# Altium PCB quadkey.PcbDoc
Units mm, origin at the board's own origin, x right, y up, seen from the top; angles counter-clockwise.
Board outline 152.4 x 101.6 mm, 2 copper layers (Top Layer, Bottom Layer); 35 components, 23 nets, 138 pads, 0 vias.
Unrouted connection lines stored in the file: 69.
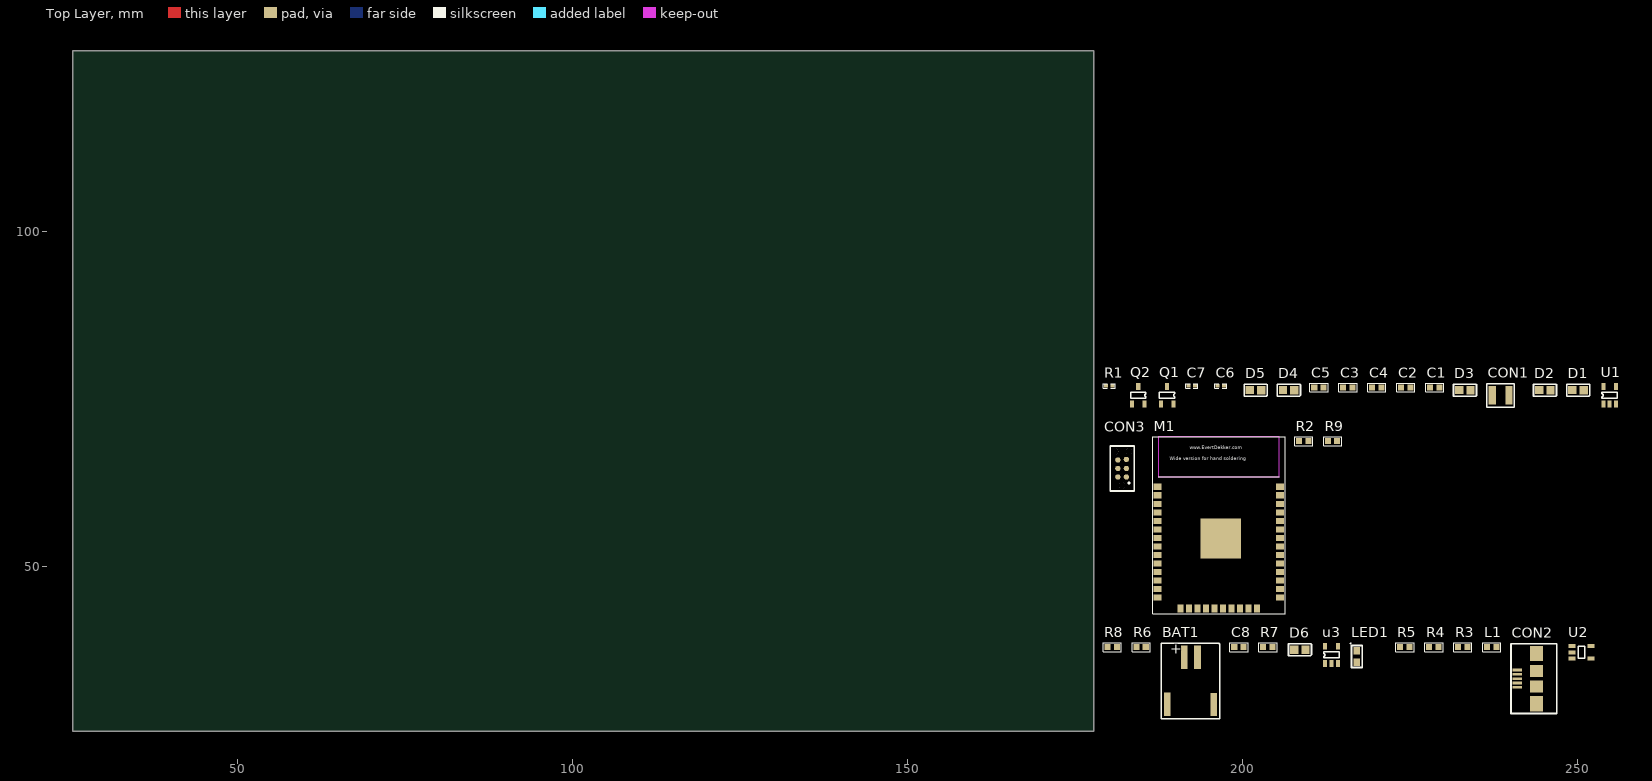
[diagram p0: Top Layer view]
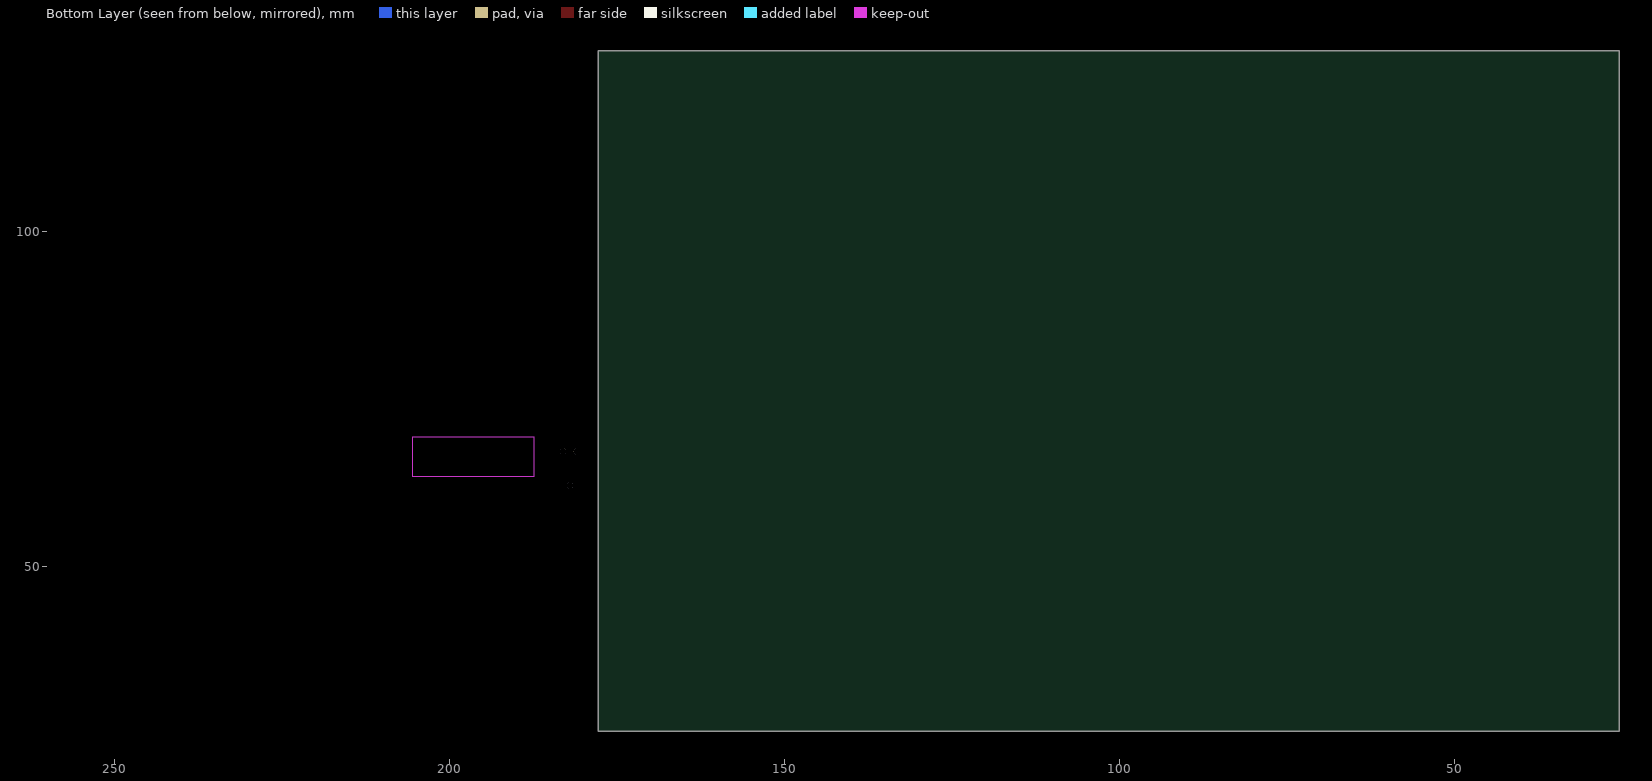
[diagram p1: Bottom Layer view, seen from below]

## Layer stack, top to bottom
Top Solder: solder mask 0.0102, Solder Resist, Dk 3.5
Top Layer: signal copper 0.0356
Dielectric 1: dielectric 0.32, FR-4, Dk 4.8
Bottom Layer: signal copper 0.0356
Bottom Solder: solder mask 0.0102, Solder Resist, Dk 3.5

## Board outline
25.4,25.4 177.8,25.4 177.8,127 25.4,127

## Design rules (kind name [scope] priority, off if disabled: settings)
Clearance [All] p1: gap=0.254 ignorepadtopadclearanceinfootprint=FALSE except(0: Arc-Hole Track-Hole SMDPad-Hole THPad-Hole Via-Hole Fill-Hole Poly-Hole Region-Hole Text-Hole)
PolygonConnect [All] p1: connectstyle=Relief reliefconductorwidth=0.254 reliefentries=4 polygonreliefangle="90 Angle" airgapwidth=0.254
RoutingVias [All] p1: holewidth=0.711 width=1.27 viastyle="Through Hole" minholewidth=0.711 minwidth=1.27 maxholewidth=0.711 maxwidth=1.27
SolderMaskExpansion [All] p1: expansion=0.102 istentingtop=FALSE
Width [All] p1: maxlimit=0.254 minlimit=0.254 preferedwidth=0.254
30 further rules are at their usual default settings.

## Classes and differential pairs
component class voeding: C1 C2 C3 C4 C5 C6 C7 CON1 D1 D2 D3 D4 D5 Q1 Q2 R1 U1
component class Designator: CON3 M1 R2 R9
component class charger: BAT1 C8 CON2 D6 L1 LED1 R3 R4 R5 R6 R7 R8 U2 u3

## Components (designator, comment, footprint, x,y, rotation, side; value= is the part's Value field where it differs from the comment)
BAT1 "batery" "jst 2pin" 191.262,36.449 r0 top
C1 "0,022uF" 0603 227.965,76.708 r0 top
C2 "470pF" 0603 223.647,76.708 r0 top
C3 "10uF" 0603 215.011,76.708 r0 top
C4 "10uF" 0603 219.329,76.708 r0 top
C5 "0,022uF" 0603 210.693,76.708 r0 top
C6 "47nF" CAPC1005X04L 196.723,76.962 r0 top
C7 "47nF" CAPC1005X04L 192.405,76.962 r0 top
C8 "10uF" 0603 198.755,37.973 r0 top
CON1 "screw connector" muratta 238.506,75.565 r0 top
CON2 "USB" microusb 242.443,33.274 r90 top
CON3 "Tagconnect" Tagconnect 181.991,64.643 r90 top
D1 "MBR0540-TP" Diode 250.063,76.327 r0 top
D2 "MBR0540-TP" Diode 245.11,76.327 r0 top
D3 "MBR0540-TP" Diode 233.172,76.327 r0 top
D4 "MBR0540-TP" Diode 206.883,76.327 r0 top
D5 "MBR0540-TP" Diode 201.93,76.327 r0 top
D6 "FC4SDCBMF6.0-T1" Diode 208.534,37.592 r0 top
L1 "ferite bead" 0603 236.474,37.973 r0 top
LED1 "LED" LED 217.043,36.576 r90 top
M1 "ESP32S_Module" ESP32S_W 196.469,52.832 r0 top
Q1 "2N7002ET1G" "N-channel FET" 188.849,75.565 r0 top
Q2 "2N7002ET1G" "N-channel FET" 184.531,75.565 r0 top
R1 "10K" CAPC1005X04L 180.086,76.962 r0 top
R2 "1k" 0603 208.407,68.707 r0 top
R3 "1k" 0603 232.156,37.973 r0 top
R4 "1k" 0603 227.838,37.973 r0 top
R5 "1k" 0603 223.52,37.973 r0 top
R6 "1k" 0603 184.15,37.973 r0 top
R7 "resistor" 0603 203.073,37.973 r0 top
R8 "resistor" 0603 179.832,37.973 r0 top
R9 "1k" 0603 212.725,68.707 r0 top
U1 "MCP1755T-500E/OT" "AP2112 sot25" 254.508,75.565 r0 top
U2 "MCP73831" MCP73831/2 250.571,37.211 r0 top
u3 "ap2112 SOT25" "AP2112 sot25" 212.979,36.83 r0 top

## Footprints (in the part's own frame and the unit in brackets; to place one, negate y for a bottom-side part, rotate by r counter-clockwise, add the part's x,y. Pads: shape width x height; smd on the part's side, far side on the other; paste and mask are expansions set on the pad)
0603 [mm]
  rect 0.9x0.9 smd: 1(0,0) 2(1.4,0)
  silkscreen extent -0.64,-0.65 2.07,0.64, body extent -0.03,-0.38 1.57,0.42, height 0.3
"AP2112 sot25" [mm]
  round 0.2 on Top Overlay: 1(-1.225,-0.55)
  rect 0.6x1 smd: 1(-0.675,-1.3) 2(0.275,-1.3) 3(1.225,-1.3) 4(1.225,1.3) 5(-0.675,1.3)
  silkscreen extent -0.87,-0.45 1.43,0.45, body extent -1.19,-1.17 1.74,1.17, height 1
CAPC1005X04L [mm]
  rect 0.6x0.5 smd: 1(-0.5,0) 2(0.5,0)
  silkscreen extent -0.9,-0.35 0.9,0.35, body extent -0.51,-0.25 0.51,0.25, height 0.5
Diode [mm]
  rect 1.25x1.22 smd: 1(-0.85,0)
  rect 1.25x1.25 smd: 2(0.85,0)
  silkscreen extent -1.69,-0.9 1.75,0.9
ESP32S_W [mm] "Esp32S Module wide for hand soldering"
  rect 1.2x0.9 smd: 1(-9.144,9.08) 2(-9.144,7.81) 3(-9.144,6.54) 4(-9.144,5.271) 5(-9.144,4) 6(-9.144,2.73) 7(-9.144,1.46) 8(-9.144,0.191) 9(-9.144,-1.079) 10(-9.144,-2.349) 11(-9.144,-3.619) 12(-9.144,-4.889) 13(-9.144,-6.159) 14(-9.144,-7.429) 25(9.144,-7.429) 26(9.144,-6.159) 27(9.144,-4.889) 28(9.144,-3.619) 29(9.144,-2.349) 30(9.144,-1.079) 31(9.144,0.191) 32(9.144,1.46) 33(9.144,2.73) 34(9.144,4) 35(9.144,5.271) 36(9.144,6.54) 37(9.144,7.81) 38(9.144,9.08)
  rect 0.9x1.2 smd: 15(-5.715,-9.08) 16(-4.447,-9.08) 17(-3.177,-9.08) 18(-1.907,-9.08) 19(-0.637,-9.08) 20(0.633,-9.08) 21(1.903,-9.08) 22(3.173,-9.08) 23(4.443,-9.08) 24(5.713,-9.08)
  rect 6x6 smd: 101(0.283,1.346)
  Keep-Out Layer region: -9.017,10.604 9.017,10.604 9.017,16.573 -9.017,16.573
  silkscreen extent -9.91,-9.84 9.91,16.57
"jst 2pin" [mm] "jst 2 pin battery connector"
  rect 1x3.5 smd: 1(0.016,0.002) 2(-2.52,-7.01) 2(2,0) 2(4.45,-7.03)
  silkscreen extent -3.38,-9.14 5.35,2.1, body extent -3.2,-8.17 4.95,0.09, height 5.38
LED [mm]
  rect 1.1x1 smd: 1(-0.85,0) 2(0.85,0)
  silkscreen extent -1.65,-0.8 1.97,0.95, body extent -0.8,-0.4 0.8,0.4, height 0.6
MCP73831/2 [mm] "MCP73831/2 ) sot23-5"
  rect 1.05x0.6 smd: 1(-1.425,0.95) 2(-1.425,0) 3(-1.425,-0.95) 4(1.425,-0.95) 5(1.425,0.95)
  silkscreen extent -0.5,-0.9 0.5,0.9, body extent -1.6,-1.45 1.2,1.45, height 1.45
microusb [mm]
  rect 0.4x1.4 smd: 1(-1.3,1.425) 2(-0.65,1.425) 3(0,1.425) 4(0.65,1.425) 5(1.3,1.425)
  rect 2.3x1.9 smd: 5(-3.75,-1.425) 5(3.75,-1.425)
  rect 1.8x1.9 smd: 5(-1.15,-1.425) 5(1.15,-1.425)
  silkscreen extent -5.19,-4.43 5.21,2.4, body extent -4.03,-4.16 3.97,1.44, height 2.82
muratta [mm]
  rect 1.1x2.7 smd: 1(-1.25,0) 2(1.25,0)
  silkscreen extent -2.05,-1.8 2.05,1.7, body extent -1.66,-1.5 1.36,1.5, height 1.4
"N-channel FET" [mm] "1=gate 2=source 3=drain"
  rect 0.6x1 smd: 1(-1.05,-1.3) 2(0.85,-1.3) 3(-0.1,1.3)
  round 0.2 on Top Overlay: 1(1.05,0)
  silkscreen extent -1.25,-0.45 1.05,0.45, body extent -1.55,-1.4 1.35,1.4, height 1.3
Tagconnect [mm]
  round 0.9 hole 0.995 unplated: 0(-2.539,-0.031) 0(2.541,-1.047) 0(2.541,0.985)
  round 0.79 smd paste-0.39: 1(-1.269,-0.666) 2(-1.269,0.604) 3(0.001,-0.666) 4(0.001,0.604) 5(1.351,-0.666) 6(1.271,0.604)
  silkscreen extent -3.35,-1.85 3.36,1.75, body extent -4.79,-3 4.71,2.9, height 26.4

## Part data
C1 C2 C3 C4 C5 C6 C7 C8: library part capacitor
D1 D2 D3 D4 D5 D6: library part diode
L1: library part Spoel
M1: "Esp-32S", Datasheet=https://espressif.com/sites/default/files/documentation/esp_wroom_32_datasheet_en.pdf
Q1 Q2: library part fet
R1 R2 R3 R4 R5 R6 R9: library part resistor

## Nets (pads, with @x,y where several pads share a name; then routed paths per layer and width w, separated by ;. In a path a pad name is that pad's centre, name@x,y a point inside that pad or via, vN(x,y) a via of type N, cw(c..) or ccw(c..) an arc to the next point about the centre after c; other vN are vias at no path point)
3V3: C8.1 CON3.1 M1.2 R2.1 R9.1 u3.5
5V: D1.1 U1.4 U1.5
EN: M1.3 R2.2
GND: BAT1.1 C8.2 CON2.5 CON3.6 M1.1 M1.15 M1.38 M1.101 Q1.2 Q2.2 R1.2 R4.1 R8.1 U1.2 U2.2 u3.2
GPIO0: M1.25 R9.2
NetC1_1: C1.1 C5.1 C6.1
NetC1_2: C1.2 C5.2 CON1.2
NetC2_1: C2.1 D3.1 D4.2
NetC2_2: C2.2 C7.1 CON1.1 D2.1 D5.2
NetC3_1: C3.1 C4.1 D2.2 D3.2 U1.1@253.833,74.265 U1.3
NetC3_2: C3.2 C4.2 D4.1 D5.1
NetC6_2: C6.2 Q1.3
NetC7_2: C7.2 Q2.3
NetCON2_1: CON2.1 L1.2
NetLED1_2: LED1.2 R5.2
NetM1_11: M1.11 R7.1 R8.2
NetQ1_1: Q1.1@187.799,74.265 Q2.1@183.481,74.265 R1.1
NetR3_1: R3.1 U2.5
NetR3_2: R3.2 R4.2
NetR5_1: R5.1 U2.1
NetR6_1: R6.1 u3.3
VBAT: BAT1.2 D6.2 R6.2 R7.2 U2.3 u3.1@212.304,35.53
VBUS: D1.2 D6.1 L1.1 LED1.1 U2.4
pads on no net: CON2.2 CON2.3 CON2.4 CON3.0 CON3.2 CON3.3 CON3.4 CON3.5 M1.4 M1.5 M1.6 M1.7 M1.8 M1.9 M1.10 M1.12 M1.13 M1.14 M1.16 M1.17 M1.18 M1.19 M1.20 M1.21 M1.22 M1.23 M1.24 M1.26 M1.27 M1.28 M1.29 M1.30 M1.31 M1.32 M1.33 M1.34 M1.35 M1.36 M1.37 Q1.1@189.899,75.565 Q2.1@185.581,75.565 U1.1@253.283,75.015 u3.1@211.754,36.28 u3.4

## Text inside footprints (layer, text, board x,y; h text height)
BAT1: Top Overlay "+" at 189.196,36.959 h1.52
M1: Top Overlay "www.EvertDekker.com" at 192.151,67.501 h0.5; Top Overlay "Wide version for hand soldering" at 189.103,65.849 h0.5